# Altium PCB WiFI Switch.v2.PcbDoc
Units mm, origin at the board's own origin, x right, y up, seen from the top; angles counter-clockwise.
Board outline 42 x 60.5 mm, 2 copper layers (Top Layer, Bottom Layer); 37 components, 30 nets, 116 pads, 29 vias.
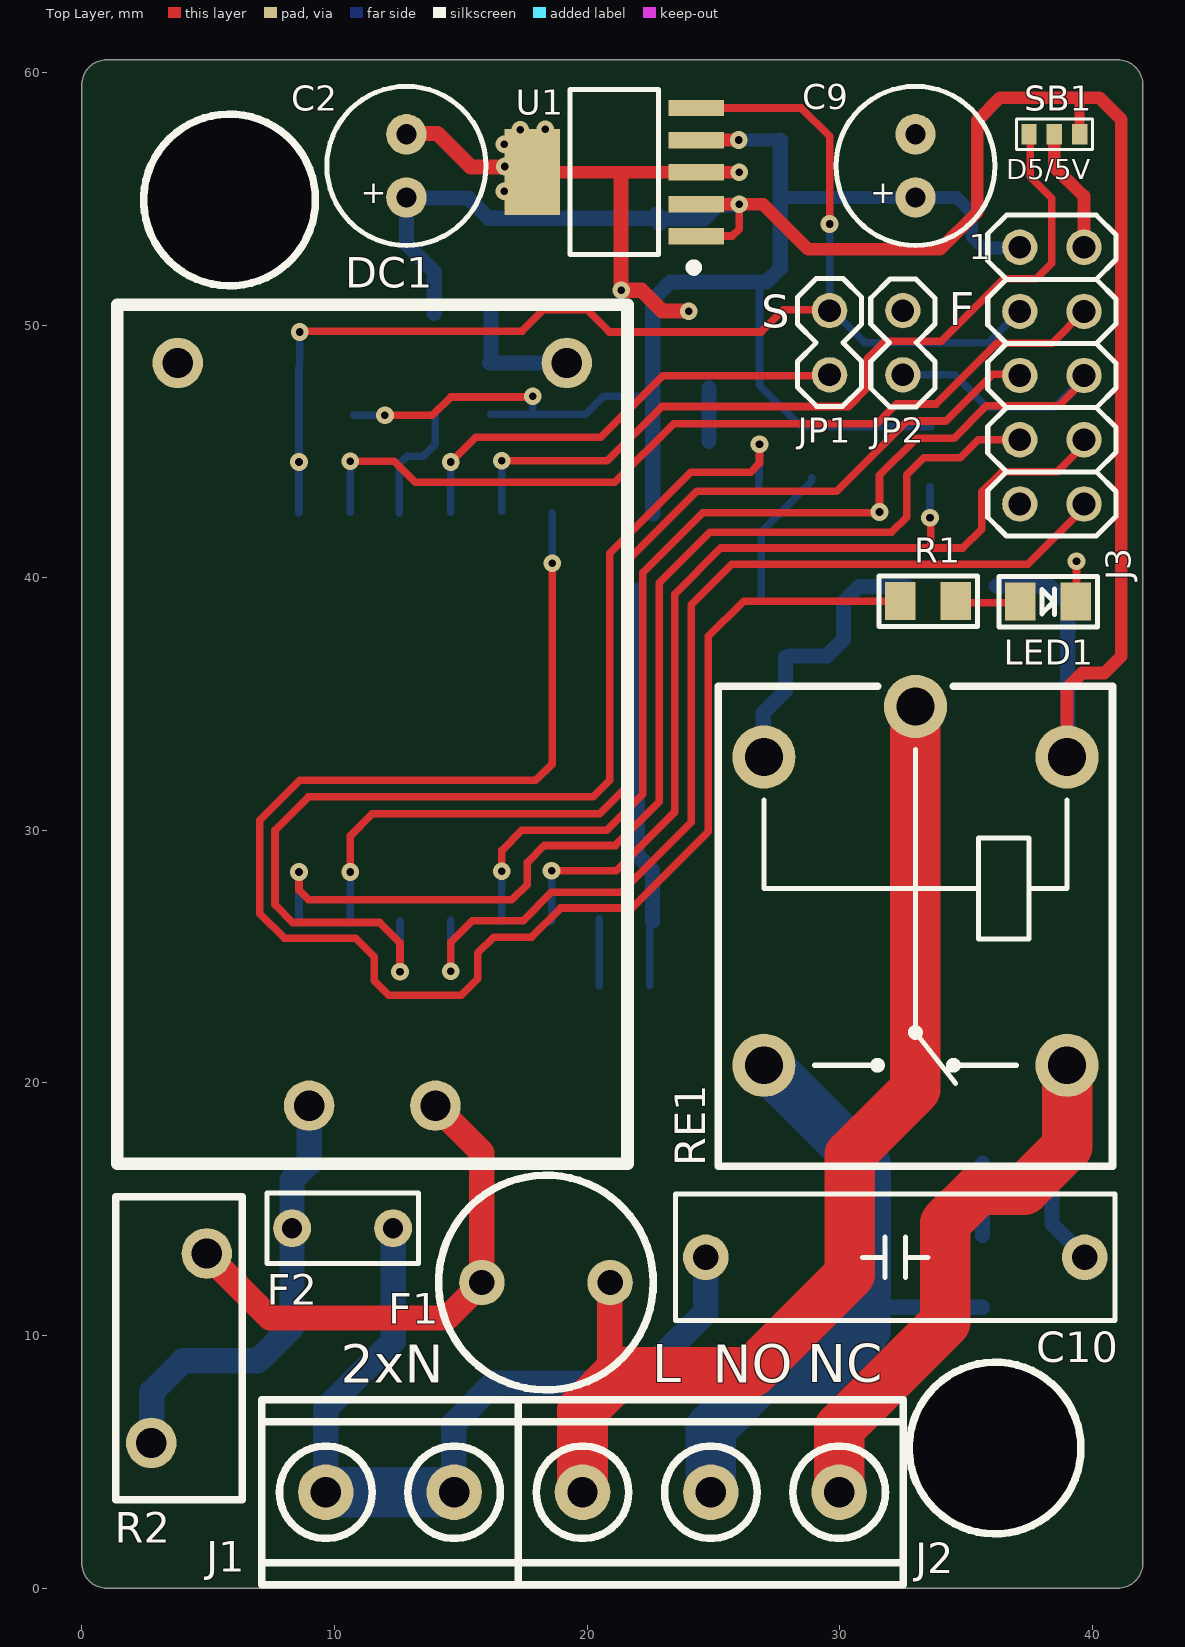
[diagram p0: Top Layer view]
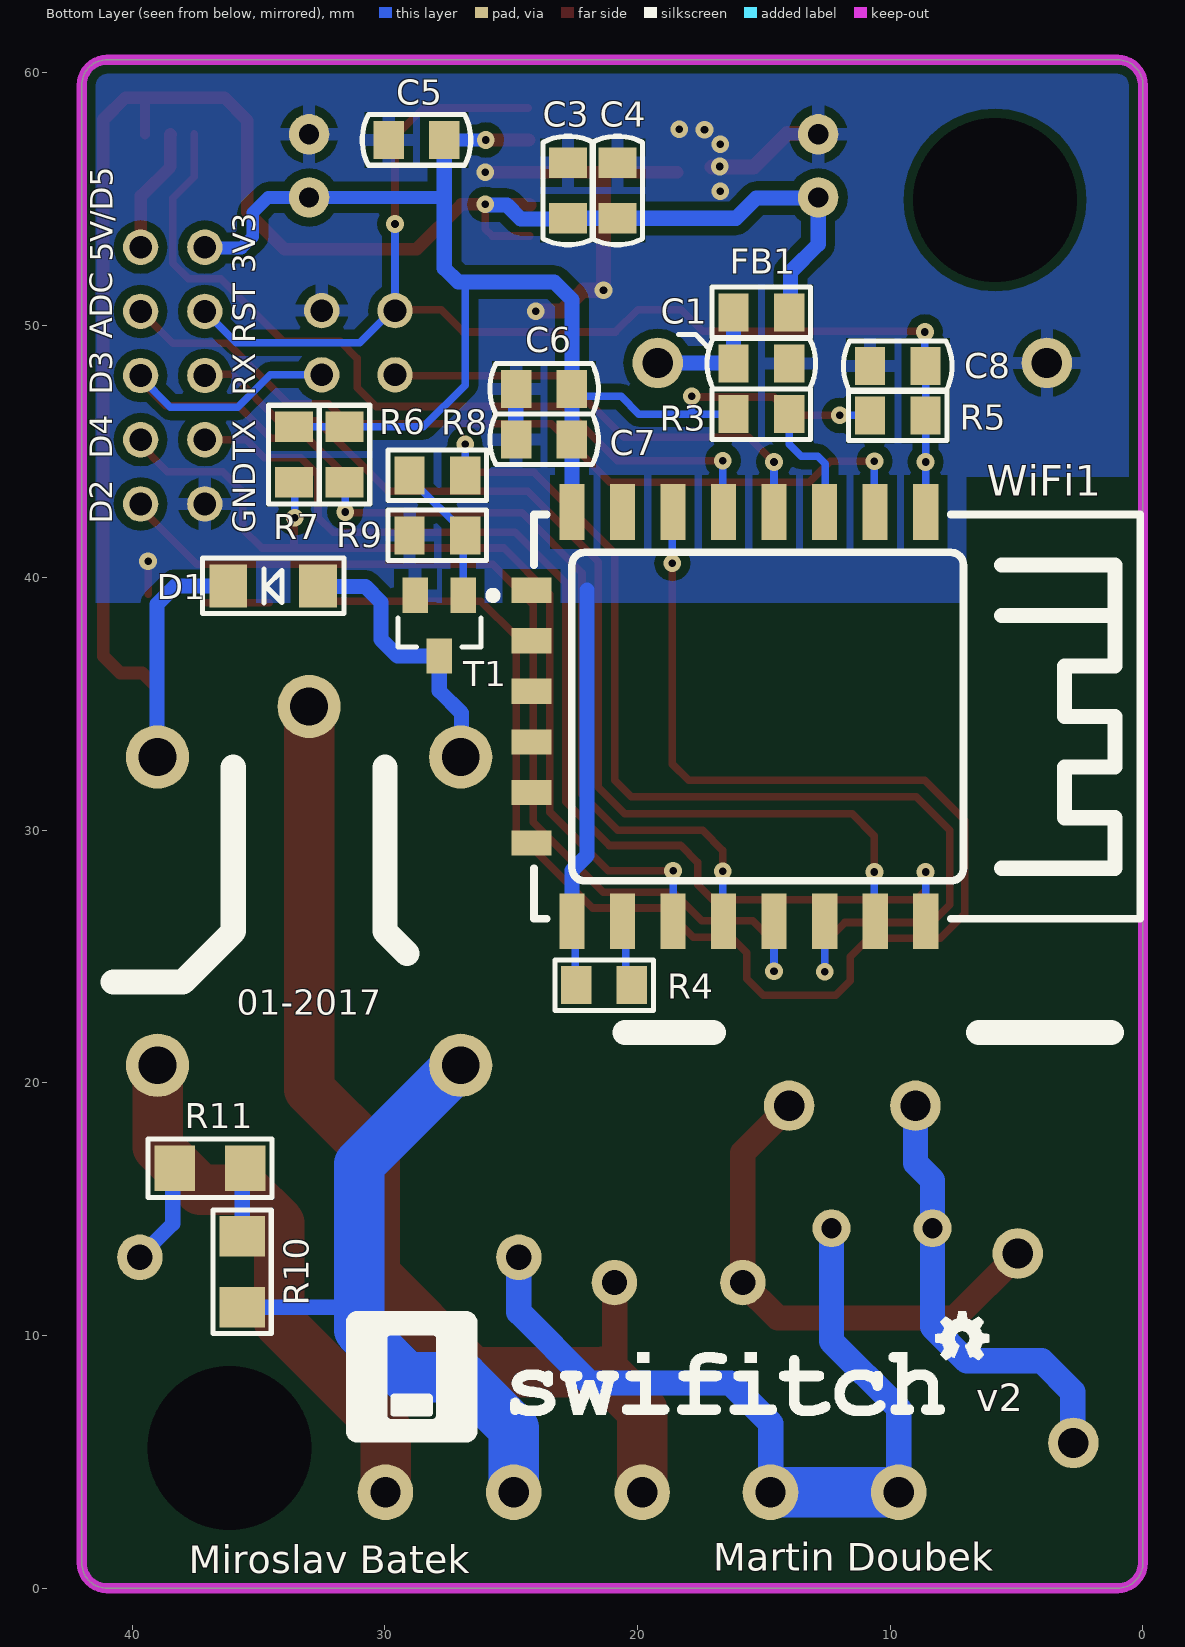
[diagram p1: Bottom Layer view, seen from below]

## Layer stack, top to bottom
Top Layer: signal copper 0.0356
Dielectric: core 0.32, FR-4, Dk 4.8
Bottom Layer: signal copper 0.0356

## Board outline
0,1 0,59.5 cw(c1,59.5) 1,60.5 41,60.5 cw(c41,59.5) 42,59.5 42,1 cw(c41,1) 41,0 1,0 cw(c1,1)

## Design rules (kind name [scope] priority, off if disabled: settings)
Clearance Clearance_1 [OnLayer('Bottom Layer')] p1: gap=0.35
Clearance [All] p2: gap=0.3
ComponentClearance [All] p1: gap=0.254 collisioncheckmode=3 verticalgap=0.254
ComponentClearance ComponentClearance_1 [All] p2: gap=0.254 collisioncheckmode=3 verticalgap=0.254
DiffPairsRouting DiffPairsRouting_1 [All] p2: maxlimit=0.254 minlimit=0.254 mostfreqgap=0.254 maxuncoupledlength=12.7
FanoutControl Fanout_LCC [IsLCC] p1: bgadir=Out bgaviamode=Centered fanoutstyle=Auto fanoutdirection=Alternating viagrid=0.025 // Fanout_LCC (Default Rule)
FanoutControl Fanout_BGA [IsBGA] p2: bgadir=Out bgaviamode=Centered fanoutstyle=Auto fanoutdirection=Alternating viagrid=0.025 // Fanout_BGA (Default Rule)
FanoutControl Fanout_Default [All] p4: bgadir=Out bgaviamode=Centered fanoutstyle=Auto fanoutdirection=Alternating viagrid=0.025 // Fanout_Default (Default Rule)
FanoutControl Fanout_Small [(CompPinCount < 5)] p5: bgadir=Out bgaviamode=Centered fanoutstyle=Auto fanoutdirection=OutThenIn viagrid=0.025 // Fanout_Small (Default Rule)
FanoutControl Fanout_BGA_1 [IsBGA] p6: bgadir=Out bgaviamode=Centered fanoutstyle=Auto fanoutdirection=Alternating viagrid=0.025 // Fanout_BGA (Default Rule)
FanoutControl Fanout_LCC_1 [IsLCC] p7: bgadir=Out bgaviamode=Centered fanoutstyle=Auto fanoutdirection=Alternating viagrid=0.025 // Fanout_LCC (Default Rule)
FanoutControl Fanout_SOIC_1 [IsSOIC] p8: bgadir=Out bgaviamode=Centered fanoutstyle=Auto fanoutdirection=Alternating viagrid=0.025 // Fanout_SOIC (Default Rule)
FanoutControl Fanout_Small_1 [(CompPinCount < 5)] p9: bgadir=Out bgaviamode=Centered fanoutstyle=Auto fanoutdirection=OutThenIn viagrid=0.025 // Fanout_Small (Default Rule)
FanoutControl Fanout_Default_1 [All] p10: bgadir=Out bgaviamode=Centered fanoutstyle=Auto fanoutdirection=Alternating viagrid=0.025 // Fanout_Default (Default Rule)
Height Height_1 [All] p2: minheight=0 maxheight=25.4 prefheight=12.7
HoleSize [All] p1: absolutevalues=TRUE maxlimit=8 minlimit=0.025 maxpercent=80.000 minpercent=20.000
HoleSize HoleSize_1 [All] p2: absolutevalues=TRUE maxlimit=8 minlimit=0.025 maxpercent=80.000 minpercent=20.000
LayerPairs LayerPairs_1 [All] p2: enforce=TRUE
PasteMaskExpansion PasteMaskExpansion_1 [All] p2: expansion=0
PlaneClearance PlaneClearance_1 [All] p2: clearance=0.508
PolygonConnect PolygonConnect_1 [IsVia] p1: connectstyle=Direct reliefconductorwidth=0.254 reliefentries=4 polygonreliefangle="90 Angle"
PolygonConnect [All] p2: connectstyle=Relief reliefconductorwidth=0.5 reliefentries=4 polygonreliefangle="90 Angle"
RoutingPriority RoutingPriority_1 [All] p2: routingpriority=0
RoutingTopology RoutingTopology_1 [All] p2: topology=Shortest
RoutingVias [All] p1: holewidth=0.8 width=1.6 viastyle="Through Hole" minholewidth=0.711 minwidth=1.27 maxholewidth=0.711 maxwidth=1.27
ShortCircuit ShortCircuit_1 [All] p2: allowed=FALSE
SolderMaskExpansion [All] p1: expansion=0.102
SolderMaskExpansion SolderMaskExpansion_1 [All] p2: expansion=0.102
TestPointUsage [All] p1: valid=0 allowmultiple=FALSE
TestPointUsage TestPointUsage_1 [All] p2: valid=0 allowmultiple=FALSE
Testpoint [(IsPad And (OnTopLayer Or OnBottomLayer))] p1: side=3 testpointundercomponent=TRUE minsize=1.016 maxsize=2.54 preferedsize=1.524 minholesize=0 maxholesize=1.016 preferedholesize=0.813 testpointgrid=0.025 style=297 order=0-112345678
Testpoint Testpoint_1 [(IsPad And (OnTopLayer Or OnBottomLayer))] p2: side=3 testpointundercomponent=TRUE minsize=1.016 maxsize=2.54 preferedsize=1.524 minholesize=0 maxholesize=1.016 preferedholesize=0.813 testpointgrid=0.025 style=297 order=0-112345678
UnRoutedNet UnRoutedNet_1 [All] p2:
Width [All] p1: maxlimit=5 minlimit=0.2 preferedwidth=0.3 minimp=50.000000 maximp=50.000000 favimp=50.000000
13 further rules are at their usual default settings.

## Components (designator, comment, footprint, x,y, rotation, side; value= is the part's Value field where it differs from the comment)
C1 "CAPACITOR" SMD_C_0805_HAND 15.1,48.475 r0 bottom
C2 "CAPACITOR_POLARIZED" TRH_CPOL_D6_3_RM2_5 12.85,56.3 r90 top
C3 "CAPACITOR" SMD_C_0805_HAND 22.75,55.325 r270 bottom
C4 "CAPACITOR" SMD_C_0805_HAND 20.8,55.325 r270 bottom
C5 "CAPACITOR" SMD_C_0805_HAND 28.75,57.325 r180 bottom
C6 "CAPACITOR" SMD_C_0805_HAND 23.7,47.475 r180 bottom
C7 "CAPACITOR" SMD_C_0805_HAND 23.7,45.475 r180 bottom
C8 "CAPACITOR" SMD_C_0805_HAND 9.7,48.375 r180 bottom
C9 "CAPACITOR_POLARIZED" TRH_CPOL_D6_3_RM2_5 33,56.3 r90 top
C10 "CAPACITOR" TRH_C_17.5x5_RM15 32.2,13.1 r0 top
D1 "glass cylinder" SMD_SOD80C 34.425,39.675 r0 bottom
DC1 "HLK-PM01" TRH_HLK-PM01 11.5,33.8 r90 top locked
F1 "Fuse" TRH_MSF250 18.375,12.1 r180 top
F2 "FUSE_TEMP" TRH_TZ-PXXX_2A 10.325,14.25 r180 top
FB1 "Ferrite" SMD_R_0805_HAND 15.1,50.5 r180 bottom
J1 "TERMINAL2" TRH_ARK500-2 12.2,3.8 r0 top locked
J2 "TERMINAL3" TRH_ARK500-3 24.9,3.8 r180 top locked
J3 "JUMPER5x2" TRH_HDR2X05 38.4,48 r270 top
JP1 "JUMPER2" TRH_HDR1X02 29.6,49.3 r270 top
JP2 "JUMPER2" TRH_HDR1X02 32.5,49.3 r90 top
LED1 "LED_GREEN" SMD_LED_0805_HAND 38.25,39.05 r0 top
R1 "1k0, 0.1W, 1%, SMD 0805" SMD_R_0805_HAND 33.5,39.075 r180 top
R2 "VARISTOR" TRH_S10K275 3.85,9.5 r270 top
R3 "10k, 0.1W, 1%, SMD 0805" SMD_R_0805_HAND 15.1,46.475 r0 bottom
R4 "10k, 0.1W, 1%, SMD 0805" SMD_R_0805_HAND 21.325,23.875 r0 bottom
R5 "10k, 0.1W, 1%, SMD 0805" SMD_R_0805_HAND 9.7,46.425 r0 bottom
R6 "10k, 0.1W, 1%, SMD 0805" SMD_R_0805_HAND 31.6,44.875 r90 bottom
R7 "10k, 0.1W, 1%, SMD 0805" SMD_R_0805_HAND 33.6,44.875 r90 bottom
R8 "2k2, 0.1W, 1%, SMD 0805" SMD_R_0805_HAND 27.925,44.05 r180 bottom
R9 "47k, 0.1W, 1%, SMD 0805" SMD_R_0805_HAND 27.925,41.675 r180 bottom
R10 "160R, 0.25W, 1%, SMD 1206" SMD_R_1206_HAND 35.65,12.525 r90 bottom
R11 "160R, 0.25W, 1%, SMD 1206" SMD_R_1206_HAND 36.925,16.625 r0 bottom
RE1 "SRD-xxVDC-SL-C" TRH_SRD-xxVDC-SL-C 33,26.2 r270 top
SB1 "Solder Switch" SOLDER_BRIDGE_SWITCH_SMALL 38.5,57.55 r0 top
T1 "" SMD_SOT23-3 27.85,38.1 r0 bottom
U1 "MCP1825T-xxxxE-DC" SMD_SOT223-5_HAND 21.075,56.05 r90 top
WiFi1 "ESP-12" SMD_ESP-12 24.1,42.5 r270 bottom locked

## Footprints (in the part's own frame and the unit in brackets; to place one, negate y for a bottom-side part, rotate by r counter-clockwise, add the part's x,y. Pads: shape width x height; smd on the part's side, far side on the other; paste and mask are expansions set on the pad)
SMD_C_0805_HAND [mm] "Chip Capacitor; Body 2.0 x 1.3 mm (LxW typ)"
  rect 1.2x1.5 smd: 1(-1.1,0) 2(1.1,0)
  silkscreen extent -2.15,-1 2.15,1, body extent -1,-0.6 1,0.6
SMD_ESP-12 [mm]
  rect 2.2x1 smd: 1(-0.1,15.502) 2(-0.1,13.502) 3(-0.1,11.502) 4(-0.1,9.502) 5(-0.1,7.502) 6(-0.1,5.502) 7(-0.1,3.502) 8(-0.1,1.502) 15(16.1,1.504) 16(16.1,3.504) 17(16.1,5.504) 18(16.1,7.504) 19(16.1,9.504) 20(16.1,11.504) 21(16.1,13.504) 22(16.1,15.504)
  rect 1x1.6 smd: 9(3,-0.098) 10(5,-0.098) 11(7,-0.098) 12(9,-0.098) 13(11,-0.098) 14(13,-0.098)
  silkscreen extent 0,0 16,24, body extent -0.15,-0.15 16.15,24.15, height 3
SMD_LED_0805_HAND [mm]
  rect 1.2x1.5 smd: 1(-1.1,0) 2(1.1,0)
  silkscreen extent -1.95,-1 1.95,1, body extent -1,-0.6 1,0.6
SMD_R_0805_HAND [mm] "Chip Resistor; Body 2.0 x 1.3 mm (LxW typ)"
  rect 1.2x1.5 smd: 1(-1.1,0) 2(1.1,0)
  silkscreen extent -1.95,-1 1.95,1, body extent -1,-0.6 1,0.6
SMD_R_1206_HAND [mm] "Chip Resistor; Body 3.2 x 1.6 mm (LxW typ)"
  rect 1.6x1.8 smd: 1(-1.4,0) 2(1.4,0)
  silkscreen extent -2.45,-1.15 2.45,1.15, body extent -1.63,-0.8 1.6,0.8
SMD_SOD80C [mm]
  rect 1.5x1.7 smd: 1(-1.775,0) 2(1.775,0)
  silkscreen extent -2.8,-1.1 2.8,1.1, body extent -1.7,-0.7 1.7,0.7
SMD_SOT23-3 [mm] "SOT-23; 3 Leads; Body 3.0 x 2.5 mm, inc. leads (LxW max)"
  rect 1x1.4 smd: 1(-0.95,-1.2) 2(0.95,-1.2) 3(0,1.2)
  silkscreen extent -2.27,-1.35 1.63,0.85, body extent -1.5,-0.7 1.5,0.7, height 1.1
SMD_SOT223-5_HAND [mm]
  rect 0.65x2.2 smd: 1(-2.54,-3.25) 2(-1.27,-3.25) 3(0,-3.25) 4(1.27,-3.25) 5(2.54,-3.25)
  rect 3.4x2.2 smd: 6(0,3.25)
  silkscreen extent -3.9,-3.27 3.27,1.75, body extent -3.25,-1.75 3.25,1.75, height 1.8
SOLDER_BRIDGE_SWITCH_SMALL [mm]
  rect 0.6x0.8 smd: 1(-1,0) 2(-0.008,0) 3(1,0)
  silkscreen extent -1.5,-0.6 1.5,0.6
TRH_ARK500-2 [mm]
  round 2.2 hole 1.2: 1(-2.54,0) 2(2.54,0)
  silkscreen extent -5.08,-3.66 5.08,3.66, body extent -5.07,-3.65 5.07,3.65
TRH_ARK500-3 [mm]
  round 2.2 hole 1.2: 1(-5.08,0) 2(0,0) 3(5.08,0)
  silkscreen extent -7.62,-3.66 7.62,3.66, body extent -7.6,-3.67 7.62,3.65
TRH_C_17.5x5_RM15 [mm]
  round 1.8 hole 1: 1(-7.5,0) 2(7.5,0)
  silkscreen extent -8.7,-2.5 8.7,2.5, body extent -8.7,-2.5 8.7,2.5, height 6
TRH_CPOL_D6_3_RM2_5 [mm]
  round 1.6 hole 0.8: 1(-1.25,0) 2(1.25,0)
  silkscreen extent -3.15,-3.15 3.15,3.15, body extent -3.16,-3.16 3.16,3.16
TRH_HDR1X02 [mm] "Connector; Header; 2 Position"
  round 1.4 hole 0.9: 1(-1.27,0) 2(1.27,0)
  silkscreen extent -2.54,-1.27 2.53,1.27, body extent -2.55,-1.28 2.55,1.28, height 9
TRH_HDR2X05 [mm] "Connector; Header; 5x2 Position"
  round 1.4 hole 0.9: 1(-5.08,-1.27) 2(-5.08,1.27) 3(-2.54,-1.27) 4(-2.54,1.27) 5(0,-1.27) 6(0,1.27) 7(2.54,-1.27) 8(2.54,1.27) 9(5.08,-1.27) 10(5.08,1.27)
  silkscreen extent -6.35,-2.54 6.35,2.54, body extent -6.36,-2.55 6.36,2.55, height 9
TRH_HLK-PM01 [mm]
  round 2 hole 1.2: 1(-14.7,2.5) 2(-14.7,-2.5) 3(14.7,7.7) 4(14.7,-7.7)
  silkscreen extent -17,-10.1 17,10.1, body extent -17,-10.1 17,10.1, height 9
TRH_MSF250 [mm]
  round 1.8 hole 1: 1(-2.54,0) 2(2.54,0)
  silkscreen extent -4.25,-4.25 4.25,4.25, body extent -4.26,-4.26 4.26,4.26, height 9
TRH_S10K275 [mm]
  round 2 hole 1.2: 1(-3.75,1.1) 2(3.75,-1.1)
  silkscreen extent -6,-2.5 6,2.5, body extent -6,-2.5 6,2.5, height 9
TRH_SRD-xxVDC-SL-C [mm]
  round 2.5 hole 1.5: 1(-8.7,0) 2(-6.7,-6) 3(5.5,-6) 4(5.5,6) 5(-6.7,6)
  silkscreen extent -9.5,-7.8 9.5,7.8, body extent -9.5,-7.8 9.5,7.8, height 9
TRH_TZ-PXXX_2A [mm]
  round 1.5 hole 0.8: 1(-2,0) 2(2,0)
  silkscreen extent -3,-1.4 3,1.4, body extent -3,-1.4 3,1.4, height 7

## Part data
C1 C3 C5 C6: library part "CAP CER 0805 4.7uF 16V X7R 10%", "Capacitor"
C2 C9: library part "CAP POL 47uF 16V 105C 20%", "Polarized Capacitor"
C4 C7 C8: library part "CAP CER 0805 100nF 50V X7R 10%", "Capacitor"
C10: library part CFAC047N, "Capacitor"
D1: library part "BAS86 SOD-80 0.2A 50V Shottky", "Shottky diode"
F1: library part "MSF 250/0.5A"
F2: library part TZ-P100/2, "Temperature Fuse"
FB1: library part 2508056017Y2
J1: library part ARK500-2
J2: library part ARK500-3
J3: library part "Header 2x5 pins, 2.54mm"
JP1 JP2: library part "Header 1x2 pins, 2.54mm"
LED1: library part "LED GREEN 0805 450mcd 120°", "LED"
R1 R3 R4: library part "RES 0805 1k0 1% 1/10W", "Resistor"
R2: library part S10K275
R5 R6 R7: library part "RES 0805 10k 1% 1/10W", "Resistor"
R8: library part "RES 0805 2k2 1% 1/10W", "Resistor"
R9: library part "RES 0805 47k 1% 1/10W", "Resistor"
R10 R11: library part "RES 1206 160R 1% 0.25W", "Resistor"
RE1: library part SRD-5VDC-SL-C
SB1: library part "Solder Bridge Switch Small"
T1: library part "BC817 NPN 45V 0.5A", "NPN General-purpose Transistor"
U1: library part MCP1825T-3302E/DC, "LDO"
WiFi1: "ESP8266 Wifi Module"

## Free pads (board coordinates)
  round 6 hole 6.5 paste+0: 0(5.85,54.95) 0(36.15,5.55)

## Via types
v1: diameter 0.7, hole 0.3, Top Layer to Bottom Layer, tented both sides, 29 vias

## Nets (pads, with @x,y where several pads share a name; then routed paths per layer and width w, separated by ;. In a path a pad name is that pad's centre, name@x,y a point inside that pad or via, vN(x,y) a via of type N, cw(c..) or ccw(c..) an arc to the next point about the centre after c; other vN are vias at no path point)
+3.3V: C5.2 C6.2 C7.2 C9.1 J3.1 R3.2 R5.2 R6.2 R7.2 U1.4 WiFi1.8 | length 59.1
  Top Layer w0.3: v1(12,46.425) 13.875,46.425 14.6,47.15 v1@17.75,47.15
  Top Layer w0.5: U1.4@24.3,57.325 v1(26.004,57.325)
  Bottom Layer w0.3: R5.2@10.775,46.425 v1(12,46.425) ; R3.2 19.95,46.475 20.65,47.175 C6.2@22.375,47.175 ; 17.85,46.475 v1(17.85,47.175) ; 26.825,51.525 26.825,47.625 28.475,45.975 R7.2
  Bottom Layer w0.5: v1(26.004,57.325) C5.2 ; 27.675,55.05 34.625,55.05 35.225,54.45 35.225,53.5 35.675,53.05 J3.1@37.125,53.05
  Bottom Layer w0.6: WiFi1.8@22.6,42.525 22.6,51 23.3,51.7 27.1,51.7 27.65,52.25 C5.2
+5V: C2.1 C3.2 C4.2 D1.2 FB1.2 RE1.5 SB1.3 U1.1 U1.2 | length 81.4
  Top Layer w0.3: U1.1@24.275,53.525 25.75,53.525 26.025,53.8 v1@26.025,54.625
  Top Layer w0.4: SB1.3 39.5,58.975
  Top Layer w0.5: U1.2@24.25,54.75 24.275,54.775 26.975,54.775 28.75,53 33.975,53 35.45,54.475 35.45,58.1 36.35,59 40.275,59 41.15,58.125 41.15,36.9 40.475,36.225 39.6,36.225 39,35.625 RE1.5 ; U1.2@24.3,54.75 U1.2@24.325,54.775
  Bottom Layer w0.6: C2.1@12.85,54.95 12.85,53.2 13.95,52.1 FB1.2@13.95,50.45 ; C2.1@12.85,55.025 15.3,55.025 16.1,54.225 C3.2 ; C3.2@22.75,54.4 22.95,54.2 24.625,54.2 25.175,54.75 v1@26.025,54.75 ; C3.2@22.85,54 C3.2@22.9,54.05 ; D1.2 38.3,39.675 39.025,38.95 RE1.5@39.025,32.875
  other v1: 26.029,54.775
ADC: J3.4 WiFi1.2 | length 34.2
  Top Layer w0.3: v1(10.625,44.604) 12.371,44.604 13.197,43.778 21.103,43.778 23.425,46.1 31.475,46.1 32.25,46.875 33.825,46.875 36.225,49.275 38.405,49.275 J3.4
  Bottom Layer w0.3: WiFi1.2@10.625,42.6 v1(10.625,44.604)
EN: R3.1 WiFi1.3 | length 4.9
  Bottom Layer w0.3: WiFi1.3@12.575,42.55 12.575,44.5 12.875,44.8 13.525,44.8 14,45.275 R3.1@14,46.45
GND: C1.1 C2.2 C3.1 C4.1 C5.1 C6.1 C7.1 C8.1 C9.2 DC1.3 J3.9 JP2.2 LED1.2 R4.2 R9.1 T1.2 U1.3 U1.6 WiFi1.15 | length 39.2
  Top Layer w0.3: LED1.2@39.375,39.35 v1@39.375,40.675
  Top Layer w0.5: U1.6@18.425,56.05 v1(26.029,56.05)
  Top Layer w0.6: C2.2@12.825,57.575 14.075,57.575 15.4,56.25 U1.6@17.05,56.25 ; 21.35,55.925 v1(21.35,51.375) 22.15,51.375 22.975,50.55 v1(24.025,50.55)
  Bottom Layer w0.3: R4.2@22.475,23.875 WiFi1.15@22.475,26.375
  Bottom Layer w0.6: 22,39.5 22,29 22.596,28.404 WiFi1.15 ; C7.1@24.825,45.4 C6.1@24.825,47.5
  other v1: 39.375,40.65 16.725,55.3 16.75,56.275 16.725,57.15 17.35,57.725 18.35,57.75
GPIO0: J3.6 JP2.1 R6.1 WiFi1.18 | length 49.2
  Top Layer w0.3: v1(16.625,28.375) 16.625,29.2 17.425,30 20.775,30 22.2,31.425 22.2,40.2 24.572,42.572 v1@31.572,42.572 ; v1(31.575,42.6) 31.575,44.05 33.05,45.525 34.525,45.525 35.8,46.8 38.675,46.8 J3.6@39.9,48.025
  Bottom Layer w0.3: WiFi1.18@16.625,26.4 v1(16.625,28.375) ; v1(31.575,42.6) R6.1@31.575,43.775 ; JP2.1 34.545,48.03 35.825,46.75 38.5,46.75 J3.6@39.675,47.925
GPIO2: J3.8 R7.1 WiFi1.17 | length 38.6
  Top Layer w0.3: v1(18.596,28.404) 21.154,28.404 23.475,30.725 23.475,39.35 25.3,41.175 34.875,41.175 35.625,41.925 35.625,43.4 36.425,44.2 38.61,44.2 J3.8@39.87,45.46 ; 33.6,41.25 v1@33.6,42.4
  Bottom Layer w0.3: WiFi1.17 v1(18.596,28.404) ; v1(33.575,42.375) R7.1@33.575,43.6
GPIO4: J3.10 WiFi1.19 | length 40.7
  Top Layer w0.3: v1(14.6,24.425) 14.6,25.575 15.45,26.425 17.466,26.425 18.591,27.55 21.35,27.55 24.125,30.325 24.125,38.925 25.725,40.525 37.45,40.525 J3.10@39.925,43
  Bottom Layer w0.3: v1(14.6,24.425) WiFi1.19@14.6,26.429
GPIO5: R8.2 WiFi1.20 | length 44.6
  Top Layer w0.3: v1(12.596,24.396) 12.596,25.554 11.8,26.35 8.35,26.35 7.65,27.05 7.65,30 8.975,31.325 20.25,31.325 20.9,31.975 20.9,40.975 24.1,44.175 26.475,44.175 26.825,44.525 v1(26.825,45.275)
  Bottom Layer w0.3: v1(12.596,24.396) WiFi1.20 ; R8.2@26.8,43.55 26.807,44.05 v1(26.825,45.275)
GPIO12: R1.2 WiFi1.6 | length 65
  Top Layer w0.3: v1(18.625,40.571) 18.625,32.625 17.975,31.975 8.625,31.975 7.05,30.4 7.05,26.7 8.025,25.725 10.85,25.725 11.575,25 11.575,24.05 12.15,23.475 15.025,23.475 15.675,24.125 15.675,25.15 16.3,25.775 17.8,25.775 18.95,26.925 21.775,26.925 24.8,29.95 24.8,37.675 26.2,39.075 R1.2@32.375,39.075
  Bottom Layer w0.3: v1(18.625,40.571) WiFi1.6@18.625,42.575
GPIO13: WiFi1.7
GPIO14: SB1.1 WiFi1.5 | length 33.2
  Top Layer w0.3: v1(16.625,44.629) 20.804,44.629 22.95,46.775 30.35,46.775 31.1,47.525 31.1,48.675 31.775,49.35 34.025,49.35 36.5,51.825 37.775,51.825 38.4,52.45 38.4,55.025 37.55,55.875 SB1.1@37.55,57.575
  Bottom Layer w0.3: WiFi1.5@16.625,42.625 v1(16.625,44.629)
GPIO15: R4.1 WiFi1.16 | length 2.6
  Bottom Layer w0.3: R4.1@20.475,23.85 WiFi1.16@20.475,26.5
GPIO16: JP1.2 WiFi1.4 | length 18.4
  Top Layer w0.3: v1(14.6,44.579) 14.629,44.579 15.6,45.55 20.55,45.55 23,48 JP1.2@29.6,48
  Bottom Layer w0.3: WiFi1.4@14.6,42.6 v1(14.6,44.579)
L: F1.1 J2.3 RE1.1 | length 43.4
  Top Layer w1: 20.9,8.4 20.9,12.05 F1.1@21.025,12.05
  Top Layer w2: J2.3 19.82,7.045 21.35,8.575 ; 21.375,8.55 26.525,8.55 30.4,12.425 30.4,17.15 33,19.75 RE1.1
N: C10.1 F2.1 J1.1 J1.2 | length 33.3
  Bottom Layer w1: J1.1 9.66,7.11 12.325,9.775 F2.1 ; J1.2@14.725,3.9 14.725,6.525 16.325,8.125 21.9,8.125 24.7,10.925 24.7,13 C10.1@24.625,13.075
  Bottom Layer w2: J1.1 J1.2@14.775,3.8
NC: J2.1 RE1.4 | length 21.1
  Top Layer w2: J2.1@29.975,4.295 29.975,6.325 34.175,10.525 34.175,14.45 35.5,15.775 37.3,15.775 39,17.475 RE1.4@39,20.65
NetC1_2: C1.2 DC1.4 FB1.1 | length 5.1
  Bottom Layer w0.6: C1.2@16.15,48.5 DC1.4 ; C1.2@16.2,48.5 FB1.1@16.2,50.525
NetC10_2: C10.2 R11.2 | length 3.7
  Bottom Layer w0.6: R11.2@38.4,16.55 38.4,14.425 C10.2@39.525,13.3
NetD1_1: D1.1 RE1.2 T1.3 | length 11
  Bottom Layer w0.6: RE1.2@26.975,32.825 26.975,34.65 27.85,35.525 T1.3@27.85,36.85 ; T1.3@28.025,36.9 29.5,36.9 30.15,37.55 30.15,39.025 30.775,39.65 D1.1@32.675,39.65
NetDC1_1: DC1.1 F2.2 R2.2 | length 17.6
  Bottom Layer w1: R2.2@2.775,5.8 2.775,7.775 4,9 6.975,9 8.325,10.35 8.325,16.15 9,16.825 DC1.1
NetDC1_2: DC1.2 F1.2 R2.1 | length 20.4
  Top Layer w1: R2.1 4.95,13.2 7.45,10.7 14.45,10.7 F1.2@15.9,12.15 ; DC1.2@14.075,19.15 14.075,19 15.835,17.24 F1.2
NetJ3_2: J3.2 SB1.2 | length 5
  Top Layer w0.5: SB1.2@38.475,57.525 SB1.2@38.5,57.5 ; SB1.2 38.492,56.258 39.625,55.125 ; J3.2 39.67,55.105
NetLED1_1: LED1.1 R1.1 | length 2.5
  Top Layer w0.3: R1.1@34.575,39 LED1.1@37.05,39
NetR8_1: R8.1 R9.2 T1.1 | length 5.6
  Bottom Layer w0.2: R9.2@26.85,41.7 R9.2@26.85,41.775
  Bottom Layer w0.3: R9.2@26.85,41.775 28.9,43.825 R8.1@28.9,43.95 ; T1.1 R9.2@26.9,41.825
NetR10_2: R10.2 R11.1 | length 2.8
  Bottom Layer w0.6: R10.2@35.65,13.975 R11.1@35.65,16.825
NO: J2.2 R10.1 RE1.3 | length 27.1
  Bottom Layer w0.6: 31.15,11.125 R10.1
  Bottom Layer w2: J2.2 24.9,6.325 26.925,8.35 29.15,8.35 31.025,10.225 31.025,16.775 RE1.3@26.925,20.875
RST: C8.2 J3.3 JP1.1 R5.1 U1.5 WiFi1.1 | length 50.3
  Top Layer w0.3: v1@8.625,49.75 17.425,49.75 18.275,50.6 20,50.6 20.875,49.725 26.9,49.725 27.775,50.6 JP1.1@29.6,50.6 ; U1.5 28.485,58.59 29.6,57.475 v1(29.6,54)
  Bottom Layer w0.3: WiFi1.1@8.6,42.575 C8.2@8.6,48.3 ; C8.2@8.625,48.425 v1(8.625,49.725) ; JP1.1 29.73,50.57 31,49.3 35.89,49.3 J3.3 ; JP1.1@29.6,50.6 v1(29.6,54)
  other v1: 8.6,44.579
RXD: J3.5 WiFi1.21 | length 43
  Top Layer w0.3: v1(10.625,28.35) 10.625,29.775 11.5,30.65 20.5,30.65 21.55,31.7 21.55,40.625 24.35,43.425 29.875,43.425 32.65,46.2 34.2,46.2 36.05,48.05 J3.5@37.35,48.05
  Bottom Layer w0.3: WiFi1.21@10.625,26.346 v1(10.625,28.35)
TXD: J3.7 WiFi1.22 | length 45.7
  Top Layer w0.3: v1(8.6,28.35) 8.6,27.625 8.975,27.25 17.025,27.25 17.625,27.85 17.625,28.725 18.3,29.4 21.125,29.4 22.85,31.125 22.85,39.8 24.85,41.8 32.05,41.8 32.65,42.4 32.65,44.075 33.327,44.752 34.777,44.752 35.485,45.46 J3.7@37.33,45.46
  Bottom Layer w0.3: WiFi1.22@8.6,26.346 v1(8.6,28.35)
pads on no net: WiFi1.9 WiFi1.10 WiFi1.11 WiFi1.12 WiFi1.13 WiFi1.14

## Polygon pours and split planes (outlines as drawn)
GND on Bottom Layer "Bottom Layer-No Net" (solid, remove dead copper, pour order 1000): 42,39 7,39 7,44 0,44 0,60.5 42,60.5 42,39 42,39.5

## Keep-outs
Bottom Layer:
  the board outline again, w0.4

## Silkscreen, mask and mechanical layers (free items; w line width, h text height)
Top Overlay:
  circle w0.3: c36.15,5.55 r3.4
  circle w0.3: c5.85,54.95 r3.4
  text "D5/5V" at 36.6,55.775 h0.8
  text "F" at 34.325,50 h1.3
  text "S" at 26.9,49.9 h1.3
  text "L" at 22.575,8.15 h1.5
  text "NC" at 28.725,8.15 h1.5
  text "2xN" at 10.25,8.125 h1.5
  text "NO" at 24.975,8.125 h1.5
Bottom Overlay:
  drawing of 2539 lines, arcs and shapes, not listed
  text "5V/D5" at 40.775,52.5 h0.9 r270
  text "3V3" at 35.125,52.05 h0.9 r270
  text "ADC" at 40.8,49.45 h0.9 r270
  text "RST" at 35.125,49.275 h0.9 r270
  text "D3" at 40.8,47.25 h0.9 r270
  text "RX" at 35.125,47.2 h0.9 r270
  text "D4" at 40.8,44.7 h0.9 r270
  text "TX" at 35.125,44.65 h0.9 r270
  text "D2" at 40.8,42.125 h0.9 r270
  text "GND" at 35.125,41.75 h0.9 r270
  text "01-2017" at 35.875,22.7 h1
  text "v2" at 6.6,7 h1.1
  text "Martin Doubek" at 17,0.7 h1.1
  text "Miroslav Batek" at 37.775,0.6 h1.1
Mechanical 1:
  lines w0.2: 0,1 ccw(c1,1) 1,0 41,0 ccw(c41,1) 42,1 42,59.5 ccw(c41,59.5) 41,60.5 1,60.5 ccw(c1,59.5) 0,59.5 0,1
  lines w1: 8,22 15.5,22 ; 22,22 24,22 26,24 28,24 ; 30,34 30,35.75 31.5,37.25 34.5,37.25 36,35.75 36,34
  text "Non-plated slots" at 10.075,-2.35 h1.5
Mechanical 2:
  region: 0.646,0 41,0 ccw(c41,1) 42,1 42,59.5 ccw(c41,59.5) 41,60.5 1,60.5 ccw(c1,59.5) 0,59.5 0,0.646 ccw(c0.646,0.646)
Mechanical 16:
  drawing of 1874 lines, arcs and shapes, not listed
  text "1" at -106.243,115.506 h1.78
  text "2" at -33.599,115.506 h1.78
  text "3" at 39.553,115.506 h1.78
  text "4" at 112.451,115.506 h1.78
  text "A" at -140.584,92.494 h1.78
  text "A" at 146.436,92.494 h1.78
  text "B" at -140.584,44.437 h1.78
  text "B" at 146.436,44.437 h1.78
  text "C" at -140.584,-4.077 h1.78
  text "C" at 146.436,-4.077 h1.78
  text "ENGINEER:" at 31.501,-41.085 h1.14
  text "TITLE:" at 69.601,-41.085 h1.14
  text "PCB DESIGNER:" at 31.501,-48.578 h1.14
  text "D" at -140.584,-52.083 h1.78
  text "D" at 146.436,-52.083 h1.78
  text "DATE:" at 31.501,-56.325 h1.14
  text "PART NO.:" at 69.601,-56.325 h1.14
  text "REV:" at 122.941,-56.325 h1.14
  text "Altium Limited" at -1.519,-58.865 h1.78
  text ".PRINT_DATE" at 32.771,-59.373 h1.78
  text "12a Rodborough Rd" at -1.519,-61.405 h1.78
  text "Frenchs Forest" at -1.519,-63.945 h1.78
  text "FILE NAME:" at 31.501,-63.945 h1.14
  text "DWG NO:" at 69.601,-63.945 h1.14
  text "SCALE:" at 122.941,-63.945 h1.14
  text "NSW 2086" at -1.519,-66.485 h1.78
  text ".PCB_FILE_NAME_NO_PATH" at 32.771,-66.993 h1.78
  text "1" at -106.243,-72.454 h1.78
  text "2" at -33.599,-72.454 h1.78
  text "3" at 39.553,-72.454 h1.78
  text "4" at 112.451,-72.454 h1.78

## Dimensions
0,1 to 42,1 on Mechanical 3
5.85,54.95 to 36.15,5.55 on Mechanical 3
5.85,54.95 to 36.15,5.55 on Mechanical 3
1,60.5 to 1,0 on Mechanical 3

## Text inside footprints (layer, text, board x,y; h text height)
C2: Top Overlay "+" at 11.05,55.6 h0.9 r180
C9: Top Overlay "+" at 31.2,55.6 h0.9 r180
J3: Top Overlay "1" at 35.1,52.6 h1